# Altium PCB GRHV_4_Tube_v0.1.PcbDoc
Units mil, origin at the board's own origin, x right, y up, seen from the top; angles counter-clockwise.
Board outline 3160 x 5220 mil, 2 copper layers (Top Layer, Bottom Layer); 42 components, 24 nets, 106 pads, 0 vias.
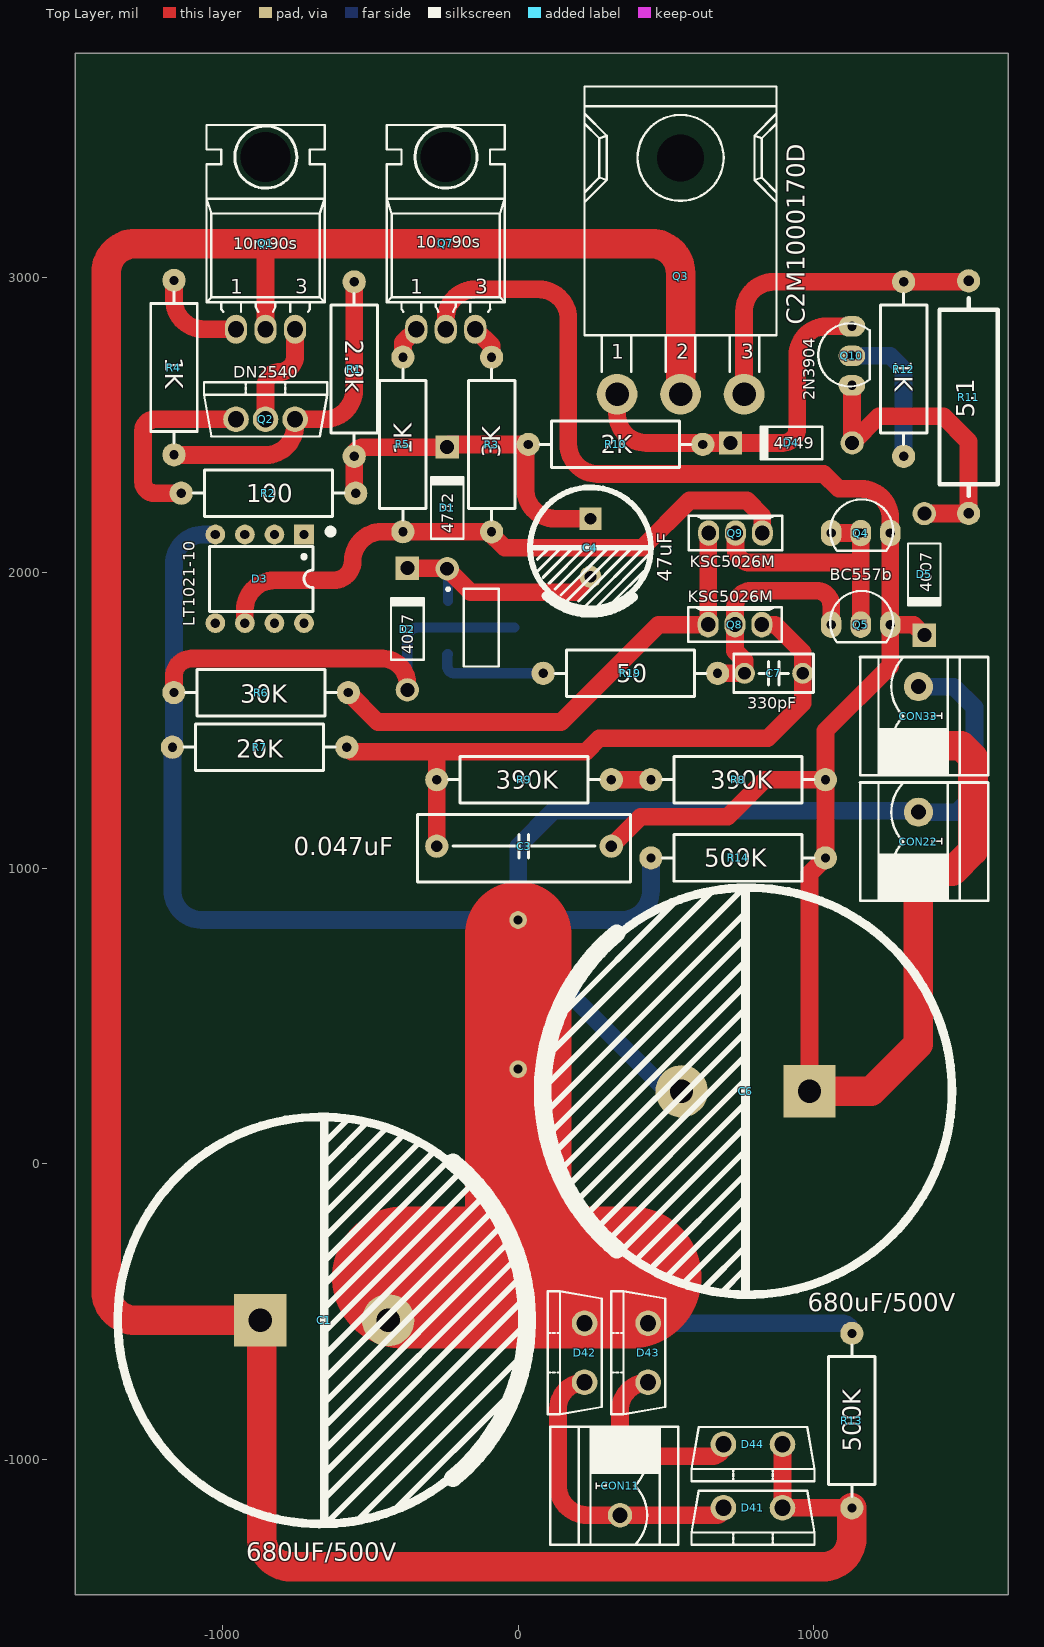
[diagram p0: Top Layer view]
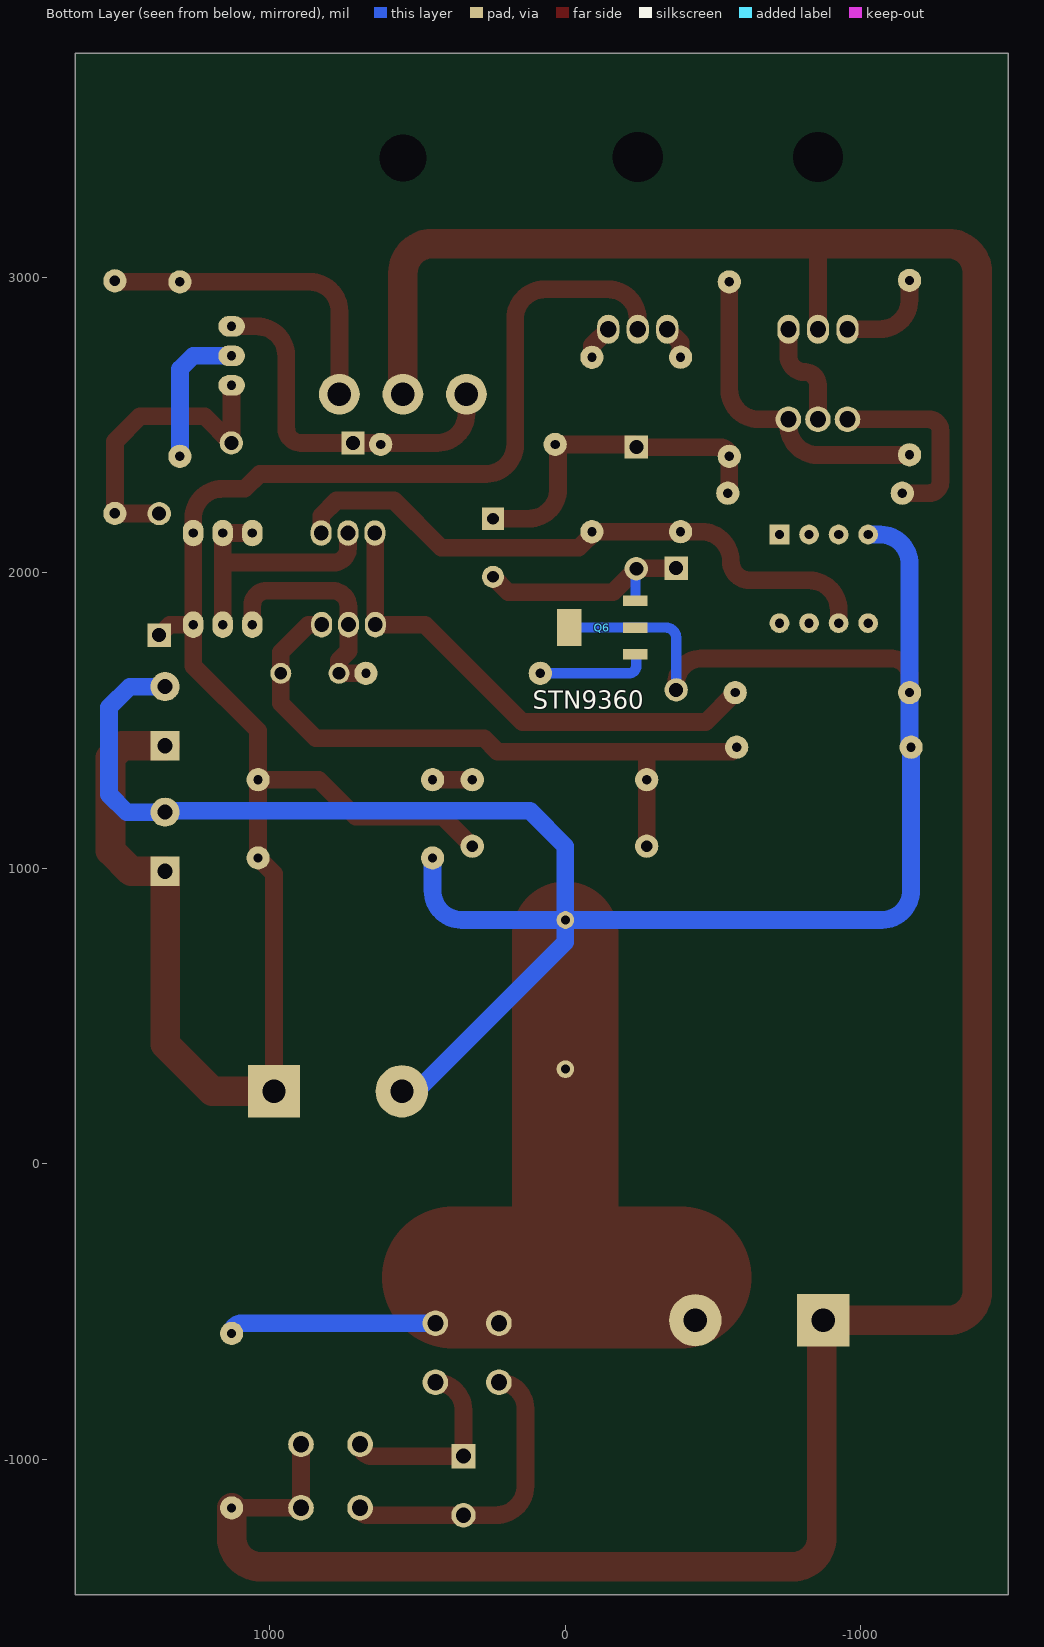
[diagram p1: Bottom Layer view, seen from below]

## Layer stack, top to bottom
Top Solder: solder mask 0.4, Solder Resist, Dk 3.5
Top Layer: signal copper 1.4
Dielectric 1: dielectric 12.6, FR-4, Dk 4.8
Bottom Layer: signal copper 1.4
Bottom Solder: solder mask 0.4, Solder Resist, Dk 3.5

## Board outline
-1500,-1460 1660,-1460 1660,3760 -1500,3760

## Design rules (kind name [scope] priority, off if disabled: settings)
Clearance [All] p1: gap=10 ignorepadtopadclearanceinfootprint=FALSE except(0: Arc-Hole Track-Hole SMDPad-Hole THPad-Hole Via-Hole Fill-Hole Poly-Hole Region-Hole Text-Hole)
PolygonConnect [All] p1: connectstyle=Relief reliefconductorwidth=10 reliefentries=4 polygonreliefangle="90 Angle" airgapwidth=10
RoutingVias [All] p1: holewidth=28 width=50 viastyle="Through Hole" minholewidth=28 minwidth=50 maxholewidth=28 maxwidth=50
SolderMaskExpansion [All] p1: expansion=4
Width [All] p1: maxlimit=500 minlimit=10 preferedwidth=60
30 further rules are at their usual default settings.

## Components (designator, comment, footprint, x,y, rotation, side; value= is the part's Value field where it differs from the comment)
C1 "680UF/500V" "CAP 11*35*60" -656.54,-530 r0 top
C3 "0.047uF" "CBB 15*18*11" 20,1075 r0 top
C4 "47uF" "CAP 5.0*10*12.5" 245,2085 r270 top
C6 "680uF/500V" "CAP 11*35*60" 770,245 r180 top
C7 "330pF" "CBB 6.3*6.3*5" 865,1660 r180 top
CON11 "AC220-2" HX5.08-2S 345,-1090 r270 top
CON22 "EDG5.08-2P" HX5.08-2L 1355,1090 r90 top
CON33 "EDG5.08-2P" HX5.08-2L 1355,1515 r90 top
D1 "4742" DO-41 -240,2220 r90 top
D2 "4007" DO-41 -375,1810 r90 top
D3 "LT1021-10" DIP8-300_MH -875,1980 r270 top
D4 "4749" DO-41 925,2440 r180 top
D5 "4007" DO-41 1375,1995 r270 top
D41 "VS-HFA08TB60-M3" TO220AC 895,-1165 r180 top
D42 "VS-HFA08TB60-M3" TO220AC 225,-740 r90 top
D43 "VS-HFA08TB60-M3" TO220AC 440,-740 r90 top
D44 "VS-HFA08TB60-M3" TO220AC 895,-950 r180 top
Q1 "10m90s" TO220H -955,2825 r0 top
Q2 "DN2540" TO220V -955,2520 r0 top
Q3 "C2M1000170D" TO247H 335,2605 r0 top
Q4 "BC557b" TO92A 1060,2135 r90 top
Q5 "BC557b" TO92A 1060,1825 r90 top
Q6 "STN9360" SOT223_L_Bottom -125,1815 r0 top
Q7 "10m90s" TO220H -345,2825 r0 top
Q8 "KSC5026M" TO126V 643.33,1825 r0 top
Q9 "KSC5026M" TO126V 645,2135 r0 top
Q10 "2N3904" TO92A 1130,2635 r180 top
R1 "2.8k" "RS 1W" -555,2690 r90 top
R2 "100" "RS 1W" -845.28,2270 r180 top
R3 "3K" "RS 1W" -90,2434.72 r270 top
R4 "1K" "RS 1W" -1165,2695 r90 top
R5 "1K" "RS 1W" -390,2435 r270 top
R6 "30K" "RS 1W" -870,1595 r0 top
R7 "20K" "RS 1W" -875,1410 r0 top
R8 "390K" "RS 1W" 745,1300 r0 top
R9 "390K" "RS 1W" 20,1300 r0 top
R10 "2K" "RS 1W" 330,2435 r0 top
R11 "5.1" "RS 2W" 1525,2595 r90 top
R12 "1K" "RS 1W" 1305,2690 r90 top
R13 "500K" "RS 1W" 1130,-870 r270 top
R14 "500K" "RS 1W" 745,1035 r0 top
R19 "50" "RS 1W" 380,1660 r180 top

## Footprints (in the part's own frame and the unit in brackets; to place one, negate y for a bottom-side part, rotate by r counter-clockwise, add the part's x,y. Pads: shape width x height; smd on the part's side, far side on the other; paste and mask are expansions set on the pad)
"CAP 5.0*10*12.5" [mm] "脚距5mm直径10mm高度12.5mm"
  rect 1.9x1.9 hole 1: 1(-2.5,0)
  round 1.9 hole 1: 2(2.5,0)
  silkscreen extent -5.2,-5.2 5.64,5.2, body extent -5,-5.01 5.01,4.99, height 12.55
"CAP 11*35*60" [mm] "脚距11mm直径35mm高度60mm"
  rect 4.5x4.5 hole 2: 1(-5.5,0)
  round 4.5 hole 2: 2(5.5,0)
  silkscreen extent -17.74,-17.51 17.44,17.49, body extent -17.91,-17.65 17.53,17.65, height 40.03
"CBB 6.3*6.3*5" [mm] "脚距5mm高6.3mm厚3mm"
  round 1.8 hole 1.1: 1(-2.5,0) 2(2.5,0)
  silkscreen extent -3.43,-1.65 3.43,1.65, body extent -3.15,-1.5 3.15,1.5, height 6.8
"CBB 15*18*11" [mm] "脚距15mm高18mm厚11mm"
  round 2 hole 1: 1(-7.5,0) 2(7.5,0)
  silkscreen extent -9.15,-3.07 9.14,2.72, body extent -9.01,-2.92 8.99,2.58, height 11.53
DIP8-300_MH [mm] "带底座 9.4*7.6*3.8(长宽高）"
  rect 1.7x1.7 hole 0.8: 1(-3.81,3.81)
  round 1.7 hole 0.8: 2(-3.81,1.27) 3(-3.81,-1.27) 4(-3.81,-3.81) 5(3.81,-3.81) 6(3.81,-1.27) 7(3.81,1.27) 8(3.81,3.81)
  silkscreen extent -4.32,-4.32 2.79,6.35, body extent -5,-5.19 5,5.19, height 7.7
DO-41 [mm] "Diode, Axial; Body 5.2 x 2.7 mm (LxDia. max), Lead Dia. 0.86 mm (max)"
  round 2 hole 1.2: 1(-5.23,0)
  rect 2x2 hole 1.2: 2(5.23,0)
  silkscreen extent -2.65,-1.4 2.75,1.4
HX5.08-2L [mm]
  rect 2.5x2.5 hole 1.3: 1(-2.54,0)
  round 2.5 hole 1.3: 2(2.54,0)
  silkscreen extent -5.08,-6 5.08,5, body extent -5.04,-5.5 4.96,2.5, height 11
HX5.08-2S [mm]
  rect 2.1x2.1 hole 1.3: 1(-2.54,0)
  round 2.1 hole 1.3: 2(2.54,0)
  silkscreen extent -5.08,-6 5.08,5, body extent -5.04,-5.5 4.96,2.5, height 11
"RS 1W" [mm] "直插色环电阻，脚距15mm，直径4mm"
  round 2 hole 0.8: 1(-7.5,0) 2(7.5,0)
  silkscreen extent -6.5,-2 6.5,2, body extent -7.8,-2.01 7.8,2.01, height 4.11
"RS 2W" [mm] "直插色环电阻，脚距20mm，直径5mm"
  round 2 hole 0.9: 1(10,0) 2(-10,0)
  silkscreen extent -8.5,-2.5 8.5,2.5, body extent -10.4,-2.51 10.4,2.51, height 5.11
SOT223_L_Bottom [mm] "SOT223, 4-Leads, Body 6.5x3.5mm, Pitch 2.3mm, Lead Span 7mm, IPC High Density"
  rect 2.1x0.9 smd far side: 1(-2.85,2.3) 2(-2.85,0) 3(-2.85,-2.3)
  rect 2.1x3.2 smd far side: 4(2.85,0)
  silkscreen extent -2.97,-3.35 1.5,3.42, body extent -1.85,-3.35 1.85,3.35, height 1.7
TO92A [mil]
  oval 90x70 hole 31.5: 1(0,0) 2(0,-100) 3(0,-200)
  silkscreen extent -60,-209 114,4
TO126V [mm]
  oval 1.8x2.2 hole 1.27: 1(0,0) 2(2.307,0) 3(4.614,0)
  silkscreen extent -1.71,-1.48 6.33,1.48
TO220AC [mm]
  round 2.2 hole 1.397: 1(0,0) 2(5.08,0)
  silkscreen extent -2.75,-1.48 7.83,3.18
TO220H [mm]
  oval 1.9x2.5 hole 4.318: 0(2.54,14.817)
  oval 1.9x2.5 hole 1.397: 1(0,0) 2(2.54,0) 3(5.08,0)
  silkscreen extent -2.54,1.5 7.62,17.57
TO220V [mm]
  round 2.2 hole 1.397: 1(0,0) 2(2.54,0) 3(5.08,0)
  silkscreen extent -2.75,-1.48 7.83,3.17
TO247H [mm]
  round 3.5 hole 4.064: 0(5.461,20.32)
  round 3.5 hole 2.032: 1(0,0) 2(5.461,0) 3(10.922,0)
  silkscreen extent -2.79,1.91 13.72,26.46

## Part data
C1 C4 C6: library part C-CAP, "直插电解电容", BOM名称=直插电解电容, 学习资源=www.ooocke.com, 版权归属=源创客
C3 C7: library part C-CBB, "CBB电容", BOM名称=CBB电容, 学习资源=www.ooocke.com, 版权归属=源创客
D1: library part 1N4742, "12V/1W稳压管"
D2 D5: library part 1N4007, "整流二极管", BOM名称=整流二极管, 学习资源=www.ooocke.com, 版权归属=源创客
D3: library part LT1021-10-2P, "10V Precision Reference 2 Pin Config"
D4: library part 1N4749, "24V/1W稳压管"
D41 D42 D43 D44: "Ultrafast Soft Recovery Diado 8A 600V"
Q1 Q7: "IC恒流源  900v 100ma"
Q2: "N沟道耗尽型DMOS场效应管 400V/150ma"
Q3: "N沟道增强型 Z-FET MOS场效应管 1000v 5A"
Q4 Q5: "音频放大-PNP型"
Q6: "High Voltage fast switching PNP型 600v 500ma"
Q8 Q9: "High Speed Switch -NPN型"
Q10: "通用三极管NPN型 40v 200ma"
R1 R2 R3 R4 R5 R6 R7 R8 R9 R10 R11 R12 R13 R14 R19: library part R-CRR, "直插色环电阻", BOM名称=色环电阻, 学习资源=www.ooocke.com, 版权归属=源创客

## Free pads (board coordinates)
  round 60 hole 30: 2(0,825) 4(0,320)

## Nets (pads, with @x,y where several pads share a name; then routed paths per layer and width w, separated by ;. In a path a pad name is that pad's centre, name@x,y a point inside that pad or via, vN(x,y) a via of type N, cw(c..) or ccw(c..) an arc to the next point about the centre after c; other vN are vias at no path point)
GND: C1.2 C6.2 CON22.2 CON33.2 D2.1 D3.4 D42.2 D43.2 pad.2 pad.4 Q6.2 Q6.4 R6.1 R7.1 R13.1 R14.1 | length 10734.4
  Top Layer w60: R6.1 -1165.28,1649.72 cw(c-1105,1649.72) -1105,1710 -460,1710 cw(c-460,1625) -375,1625 D2.1 ; D42.2 D43.2
  Top Layer w360: 0,-385 pad.4 0,775
  Top Layer w480: -390,-385 0,-385 380,-385
  Bottom Layer w35: D2.1 -375,1780 cw(c-340,1780) -340,1815 Q6.2 Q6.4
  Bottom Layer w60: D3.4 -1065.28,2130 ccw(c-1065.28,2030) -1165.28,2030 R6.1 -1165.28,1415 cw(c-1170.28,1415) R7.1 -1170.28,925 ccw(c-1070.28,925) -1070.28,825 pad.2 ; D43.2 1095.28,-540 cw(c1095.28,-574.72) R13.1 ; R14.1 449.72,925 cw(c349.72,925) 349.72,825 pad.2 ; C6.2 505,245 0,750 pad.2 ; CON33.2 1475,1615 1545,1545 1545,1250 1485,1190 CON22.2 1350,1195 120,1195 0,1075 pad.2
NetC1_1: C1.1 D41.1 D44.1 Q1.2 Q3.2 R13.2 | length 10188.3
  Top Layer w60: -860,3115 cw(c-860,3110) -855,3110 Q1.2 ; D44.1 D41.1 1130,-1165 R13.2
  Top Layer w100: Q3.2 550,3015 ccw(c450,3015) 450,3115 -860,3115 -1295,3115 ccw(c-1295,3015) -1395,3015 -1395,-430 ccw(c-1295,-430) -1295,-530 C1.1 -868.07,-530 -868.07,-1265 ccw(c-768.07,-1265) -768.07,-1365 1030,-1365 ccw(c1030,-1265) 1130,-1265 R13.2
NetC3_1: C3.1 C7.1 Q8.3 R7.2 R9.1 | length 2287.4
  Top Layer w60: R7.2 -564.72,1395 -275,1395 ; C3.1 R9.1 -275.28,1394.72 -275,1395 ; Q8.3 870,1825 963.43,1731.57 C7.1 963.43,1558.43 845,1440 275,1440 230,1395 -275,1395
NetC3_2: C3.2 C6.1 CON22.1 CON33.1 D5.2 Q4.3 Q5.3 Q7.2 R8.2 R14.2 | length 6965.7
  Top Layer w60: Q7.2 -245,2860 cw(c-145,2860) -145,2960 70,2960 cw(c70,2860) 170,2860 170,2435 ccw(c270,2435) 270,2335 1035,2335 1085,2285 1160,2285 cw(c1160,2185) 1260,2185 Q4.3 Q5.3 ; C3.2 415.28,1175 710,1175 835,1300 R8.2 ; C6.1 986.54,981.26 R14.2 R8.2 ; D5.2 1339.09,1825 Q5.3 ; R8.2 1040.28,1465.28 1260,1685 Q5.3
  Top Layer w100: C6.1 1195,245 1355,405 CON22.1 1470,990 1540,1060 1540,1375 1500,1415 CON33.1
NetC4_1: C4.1 D1.2 R1.1 R2.1 R10.1 | length 1174.9
  Top Layer w60: R2.1 cw(c-550,2275) -555,2275 R1.1 ; C4.1 124.72,2183.43 cw(c124.72,2283.43) 24.72,2283.43 24.72,2435 -230.91,2435 ccw(c-230.91,2425.91) D1.2 -523.82,2425.91 ccw(c-523.82,2394.72) R1.1 ; R1.1 ccw(c-550,2394.72) -550,2389.72 ccw(c-555,2389.72) R1.1
NetC4_2: C4.2 D1.1 D2.2 Q6.1 | length 785.3
  Top Layer w60: D2.2 -241.81,2015.91 cw(c-241.81,2014.09) D1.1 -160.91,1935 193.43,1935 C4.2
  Bottom Layer w35: D1.1 cw(c-240,2011.3) -237.2,2011.3 Q6.1
NetC7_2: C7.2 Q5.1 Q8.2 R19.1 | length 780.1
  Top Layer w60: R19.1 C7.2 766.57,1703.43 734.17,1735.83 Q8.2 734.17,1884.17 cw(c790,1884.17) 790,1940 1010,1940 cw(c1010,1890) 1060,1890 Q5.1
NetCON11_1: CON11.1 D43.1 D44.2 | length 677.1
  Top Layer w60: D43.1 ccw(c440,-835) 345,-835 CON11.1 655,-990 ccw(c655,-950) D44.2
NetCON11_2: CON11.2 D41.2 D42.1 | length 1032.7
  Top Layer w60: D42.1 ccw(c225,-830) 135,-830 135,-1090 ccw(c235,-1090) 235,-1190 CON11.2 670,-1190 ccw(c670,-1165) D41.2
NetD3_6: D3.6 Q9.3 R3.2 R5.2 | length 2116.4
  Top Layer w60: D3.6 -925,1875 cw(c-825,1875) -825,1975 -624.72,1975 ccw(c-624.72,2039.72) -560,2039.72 cw(c-460,2039.72) -460,2139.72 R5.2 -100,2139.72 -45.28,2085 420,2085 580,2245 775,2245 826.67,2193.33 Q9.3
NetD4_1: D4.1 D5.1 Q10.1 R11.2 | length 1056
  Top Layer w60: Q10.1 1130,2440.91 ccw(c1130.91,2440.91) D4.1 1220.91,2530 1440,2530 1525,2445 R11.2 1524.61,2200.91 D5.1
NetD4_2: D4.2 Q3.1 Q10.3 R10.2 | length 1247.7
  Top Layer w60: Q3.1 335,2540 ccw(c435,2540) 435,2440 D4.2 895,2440 ccw(c895,2490) 945,2490 945,2735 cw(c1045,2735) 1045,2835 Q10.3
NetQ1_1: Q1.3 Q2.2 | length 362.1
  Top Layer w60: Q2.2 -855,2635 cw(c-810,2635) -810,2680 ccw(c-810,2735) -755,2735 Q1.3
NetQ1_2: Q1.1 R4.2 | length 332.4
  Top Layer w60: R4.2 -1165,2925 ccw(c-1065,2925) -1065,2825 Q1.1
NetQ2_1: Q2.3 R1.2 R4.1 | length 1105.5
  Top Layer w60: R4.1@-1160,2398.94 -855,2398.94 ccw(c-855,2498.94) -755,2498.94 Q2.3 -655,2520 ccw(c-655,2620) -555,2620 R1.2
NetQ2_2: Q2.1 R2.2 | length 660.5
  Top Layer w60: R2.2 -1230.86,2270 cw(c-1230.86,2309.14) -1270,2309.14 -1270,2480 cw(c-1230,2480) -1230,2520 Q2.1
NetQ3_1: Q3.3 R11.1 R12.2 | length 1098.8
  Top Layer w60: Q3.3 765,2885.28 cw(c865,2885.28) 865,2985.28 R12.2 1521.57,2985.28 R11.1
NetQ4_2: Q4.1 Q4.2 Q5.2 Q9.2 | length 913.1
  Top Layer w60: Q9.2 735.83,2084.17 ccw(c785,2084.17) 785,2035 1160,2035 ; Q4.1 Q4.2 1160,2035 ; Q5.2 1160,2035
NetQ6_3: Q6.3 R19.2 | length 380
  Bottom Layer w35: Q6.3 ccw(c-237.2,1721.65) -240,1721.65 -240,1685 ccw(c-215,1685) -215,1660 R19.2
NetQ7_1: Q7.3 R3.1 | length 117.8
  Top Layer w60: Q7.3 -90,2770 R3.1
NetQ7_2: Q7.1 R5.1 | length 113.4
  Top Layer w60: R5.1 -390,2780 Q7.1
NetQ8_1: Q8.1 Q9.1 R6.2 | length 1713.9
  Top Layer w60: R6.2@-579.72,1600 R6.2 -474.72,1495 145,1495 475,1825 Q8.1 643.33,2133.33 Q9.1
NetQ10_3: Q10.2 R12.1 | length 488.9
  Bottom Layer w60: Q10.2 1260,2735 1305,2690 R12.1
NetR8_1: R8.1 R9.2 | length 134.4
  Top Layer w60: R9.2 R8.1
pads on no net: D3.1 D3.2 D3.3 D3.5 D3.7 D3.8 Q1.0 Q3.0 Q7.0

## Silkscreen, mask and mechanical layers (free items; w line width, h text height)
Mechanical 1:
  the board outline again, w10
Drill Drawing:
  the board outline again, w10

## Text inside footprints (layer, text, board x,y; h text height)
CON11: Top Overlay "1" at 262,-1073 h40 r270
CON22: Top Overlay "1" at 1438,1073 h40 r90
CON33: Top Overlay "1" at 1438,1498 h40 r90
Q1: Top Overlay "3" at -755,2945 h50; Top Overlay "1" at -975,2945 h50
Q3: Top Overlay "3" at 755,2725 h50; Top Overlay "2" at 535,2725 h50; Top Overlay "1" at 315,2725 h50
Q7: Top Overlay "3" at -145,2945 h50; Top Overlay "1" at -365,2945 h50